# EAGLE board ATTiny84-RFM95W-BME280-panels-2020-01-30 (EAGLE 9.5.2)
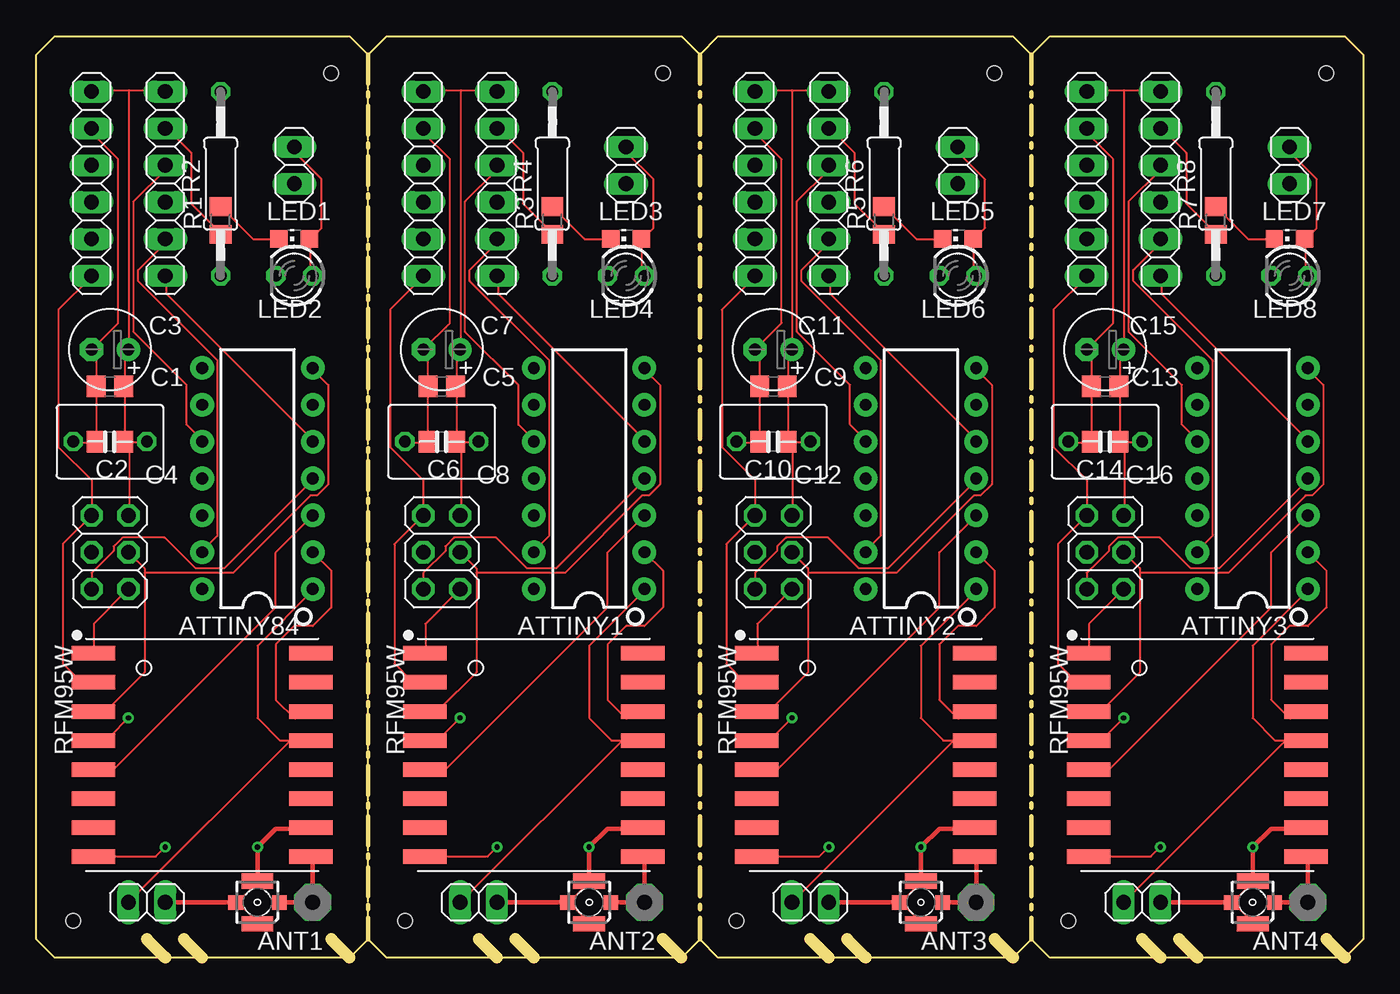
[diagram p0: board, top side]
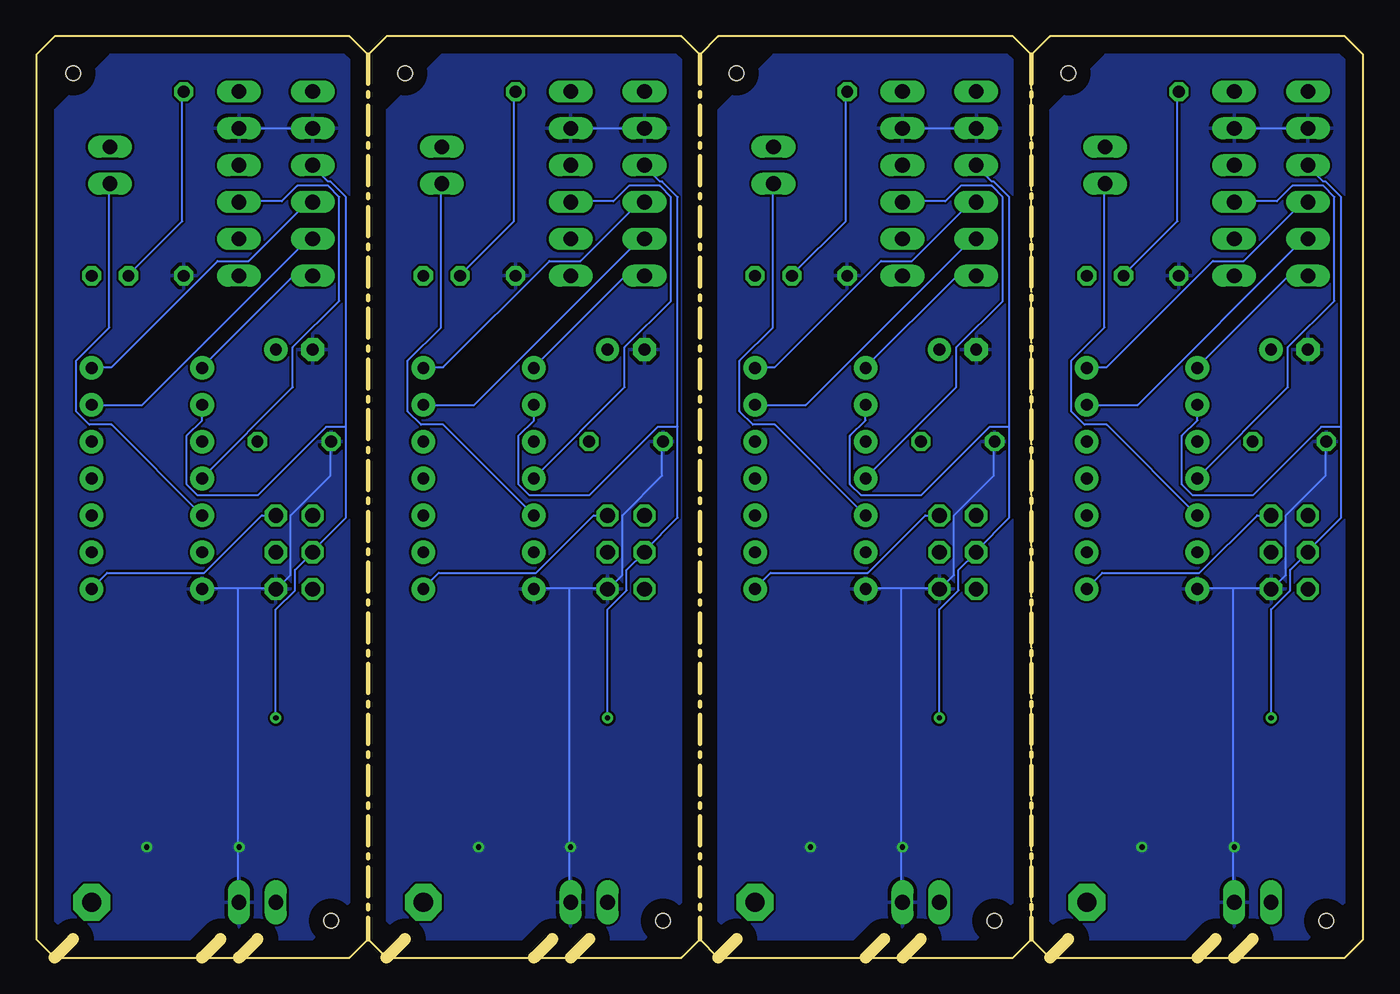
[diagram p1: board, bottom side, seen from below]

Size 91.44 x 63.5 mm. Coordinates in mm from the lower left corner, seen from the top.
Outline: 1.27,0 8.89,0
Outline: 8.89,0 11.43,0
Outline: 11.43,0 21.59,0
Outline: 7.62,1.27 8.89,0
Outline: 10.16,1.27 11.43,0
Outline: 20.32,1.27 21.59,0
Outline: 22.86,62.23 21.59,63.5 1.27,63.5 0,62.23 0,1.27 1.27,0
Outline: 22.86,62.23 22.86,1.27
Outline: 22.86,1.27 21.59,0
Outline: 21.59,0 1.27,0
Outline: 24.13,0 31.75,0
Outline: 31.75,0 34.29,0
Outline: 34.29,0 44.45,0
Outline: 30.48,1.27 31.75,0
Outline: 33.02,1.27 34.29,0
Outline: 43.18,1.27 44.45,0
Outline: 45.72,62.23 44.45,63.5 24.13,63.5 22.86,62.23
Outline: 45.72,62.23 45.72,1.27
Outline: 45.72,1.27 44.45,0
Outline: 44.45,0 24.13,0
Outline: 24.13,0 22.86,1.27
Outline: 46.99,0 54.61,0
Outline: 54.61,0 57.15,0
Outline: 57.15,0 67.31,0
Outline: 53.34,1.27 54.61,0
Outline: 55.88,1.27 57.15,0
Outline: 66.04,1.27 67.31,0
Outline: 68.58,62.23 67.31,63.5 46.99,63.5 45.72,62.23
Outline: 68.58,62.23 68.58,1.27
Outline: 68.58,1.27 67.31,0
Outline: 67.31,0 46.99,0
Outline: 46.99,0 45.72,1.27
Outline: 69.85,0 77.47,0
Outline: 77.47,0 80.01,0
Outline: 80.01,0 90.17,0
Outline: 76.2,1.27 77.47,0
Outline: 78.74,1.27 80.01,0
Outline: 88.9,1.27 90.17,0
Outline: 90.17,0 91.44,1.27 91.44,62.23 90.17,63.5 69.85,63.5 68.58,62.23
Outline: 90.17,0 69.85,0
Outline: 69.85,0 68.58,1.27
Copper layers (1*16): Top 0.035mm / dielectric 1.5mm / Bottom 0.035mm
Design rules "default": minimum track width 6mil, minimum drill 0.35mm, track to track 6mil, track to pad 6mil, pad to pad 6mil, via to via 6mil, smd to smd 6mil, copper to edge 40mil, drill to drill 6mil, minimum pad ring 10mil, minimum via ring 8mil, stop-mask expansion 4mil, vias tented up to drill 0mil, thermal gap 10mil
Holes 1 mm at 2.54,2.54 20.32,60.96 25.4,2.54 43.18,60.96 48.26,2.54 66.04,60.96 71.12,2.54 88.9,60.96
Milling: 106 lines

## Footprints (pad centres in the part's own frame; a part is rotated, then mirrored left to right if it is on the bottom)
PAD-01 = drill 1.321 pad 2.54 octagon: 1 0,0
DIP14 = drill 0.813 pad 1.626: 1 -7.62,-3.81; 2 -5.08,-3.81; 3 -2.54,-3.81; 4 0,-3.81; 5 2.54,-3.81; 6 5.08,-3.81; 7 7.62,-3.81; 8 7.62,3.81; 9 5.08,3.81; 10 2.54,3.81; 11 0,3.81; 12 -2.54,3.81; 13 -5.08,3.81; 14 -7.62,3.81
C0805 = smd 1.3 x 1.5: 1 -0.95,0; 2 0.95,0
E2,5-6 = drill 0.813 pad 1.6: + -1.27,0 | drill 0.813 pad 1.6 octagon: - 1.27,0
C050-050X075 = drill 0.813 octagon: 1 -2.54,0; 2 2.54,0
1X06 = drill 1.016 long: 1 -6.35,0; 2 -3.81,0; 3 -1.27,0; 4 1.27,0; 5 3.81,0; 6 6.35,0
1X02 = drill 1.016 long: 1 -1.27,0; 2 1.27,0
2X03 = drill 1.016 octagon: 1 -2.54,-1.27; 2 -2.54,1.27; 3 0,-1.27; 4 0,1.27; 5 2.54,-1.27; 6 2.54,1.27
CHIP-LED0805 = smd 1.2 x 1.2: A 0,-1.05; C 0,1.05
LED3MM = drill 0.813 octagon: A -1.27,0; K 1.27,0
R0805 = smd 1.3 x 1.5: 1 -0.95,0; 2 0.95,0
0207/12 = drill 0.813 octagon: 1 -6.35,0; 2 6.35,0
RFM95/96/97/98W = smd 3 x 1: 3.3V 7.5,1; !RESET -7.5,-3; ANT 7.5,-7; DIO0 7.5,3; DIO1 7.5,5; DIO2 7.5,7; DIO3 7.5,-3; DIO4 7.5,-1; DIO5 -7.5,-5; GND@1 -7.5,7; GND@2 -7.5,-7; GND@3 7.5,-5; MISO -7.5,5; MOSI -7.5,3; NSS -7.5,-1; SCK -7.5,1
734120110 = smd 1 x 1: 1 0,-1.5; S@1 0,1.5 | smd 1.05 x 2.2: S@2 -1.475,0; S@3 1.475,0

## Placement (x,y rotation side)
ANT1  [PAD-01]  19.05,3.81 0 top
ANT2  [PAD-01]  41.91,3.81 0 top
ANT3  [PAD-01]  64.77,3.81 0 top
ANT4  [PAD-01]  87.63,3.81 0 top
ATTINY1  ATTINY84  [DIP14]  38.1,33.02 90 top
ATTINY2  ATTINY84ATTINY84-20PU  [DIP14]  60.96,33.02 90 top
ATTINY3  ATTINY84ATTINY84-20PU  [DIP14]  83.82,33.02 90 top
ATTINY84  ATTINY84ATTINY84-20PU  [DIP14]  15.24,33.02 90 top
C1  100µF  [C0805]  5.08,39.37 180 top
C2  100nF  [C0805]  5.08,35.56 180 top
C3  100µF  [E2,5-6]  5.08,41.91 180 top
C4  100nF  [C050-050X075]  5.08,35.56 180 top
C5  100µF  [C0805]  27.94,39.37 180 top
C6  100nF  [C0805]  27.94,35.56 180 top
C7  100µF  [E2,5-6]  27.94,41.91 180 top
C8  100nF  [C050-050X075]  27.94,35.56 180 top
C9  100µF  [C0805]  50.8,39.37 180 top
C10  100nF  [C0805]  50.8,35.56 180 top
C11  100µF  [E2,5-6]  50.8,41.91 180 top
C12  100nF  [C050-050X075]  50.8,35.56 180 top
C13  100µF  [C0805]  73.66,39.37 180 top
C14  100nF  [C0805]  73.66,35.56 180 top
C15  100µF  [E2,5-6]  73.66,41.91 180 top
C16  100nF  [C050-050X075]  73.66,35.56 180 top
JP1  SPI  [1X06]  3.81,53.34 270 top
JP2  LED  [1X02]  17.78,54.61 270 top
JP3  GPIO  [1X06]  8.89,53.34 270 top
JP4  Power  [1X02]  7.62,3.81 0 top
JP5  ISP  [2X03]  5.08,27.94 270 top
JP6  SPI  [1X06]  26.67,53.34 270 top
JP7  LED  [1X02]  40.64,54.61 270 top
JP8  GPIO  [1X06]  31.75,53.34 270 top
JP9  Power  [1X02]  30.48,3.81 0 top
JP10  ISP  [2X03]  27.94,27.94 270 top
JP11  SPI  [1X06]  49.53,53.34 270 top
JP12  LED  [1X02]  63.5,54.61 270 top
JP13  GPIO  [1X06]  54.61,53.34 270 top
JP14  Power  [1X02]  53.34,3.81 0 top
JP15  ISP  [2X03]  50.8,27.94 270 top
JP16  SPI  [1X06]  72.39,53.34 270 top
JP17  LED  [1X02]  86.36,54.61 270 top
JP18  GPIO  [1X06]  77.47,53.34 270 top
JP19  Power  [1X02]  76.2,3.81 0 top
JP20  ISP  [2X03]  73.66,27.94 270 top
LED1  [CHIP-LED0805]  17.78,49.53 90 top
LED2  [LED3MM]  17.78,46.99 180 top
LED3  [CHIP-LED0805]  40.64,49.53 90 top
LED4  [LED3MM]  40.64,46.99 180 top
LED5  [CHIP-LED0805]  63.5,49.53 90 top
LED6  [LED3MM]  63.5,46.99 180 top
LED7  [CHIP-LED0805]  86.36,49.53 90 top
LED8  [LED3MM]  86.36,46.99 180 top
R1  470  [R0805]  12.7,50.8 90 top
R2  470  [0207/12]  12.7,53.34 90 top
R3  470  [R0805]  35.56,50.8 90 top
R4  470  [0207/12]  35.56,53.34 90 top
R5  470  [R0805]  58.42,50.8 90 top
R6  470  [0207/12]  58.42,53.34 90 top
R7  470  [R0805]  81.28,50.8 90 top
R8  470  [0207/12]  81.28,53.34 90 top
RFM95W  RFM95W  [RFM95/96/97/98W]  11.43,13.97 0 top
RFM95W1  RFM95W  [RFM95/96/97/98W]  34.29,13.97 0 top
RFM95W2  RFM95W  [RFM95/96/97/98W]  57.15,13.97 0 top
RFM95W3  RFM95W  [RFM95/96/97/98W]  80.01,13.97 0 top
X1  734120110  [734120110]  15.24,3.81 90 top
X2  734120110  [734120110]  38.1,3.81 90 top
X3  734120110  [734120110]  60.96,3.81 90 top
X4  734120110  [734120110]  83.82,3.81 90 top

## Library data of the parts
ANT1-ANT4 = discrete
ATTINY1-ATTINY3 ATTINY84 = SparkFun-IC-Microcontroller
C1-C16 = rcl; SPICEPREFIX: C
JP1-JP20 = pinhead
LED1-LED8 = led
R1-R8 = rcl; SPICEPREFIX: R
RFM95W RFM95W1-RFM95W3 = SparkFun-RF; PROD_ID: IC-13959; PROD_NAME: HopeRF RFM95W
X1-X4 = con-coax

## Nets
CSB: ATTINY84.6 JP1.5
CSB1: ATTINY1.6 JP6.5
CSB2: ATTINY2.6 JP11.5
CSB3: ATTINY3.6 JP16.5
CSH: ATTINY84.3 RFM95W.NSS
CSH1: ATTINY1.3 RFM95W1.NSS
CSH2: ATTINY2.3 RFM95W2.NSS
CSH3: ATTINY3.3 RFM95W3.NSS
DIO: ATTINY84.2 RFM95W.DIO0
DIO1: ATTINY1.2 RFM95W1.DIO0
DIO2: ATTINY2.2 RFM95W2.DIO0
DIO3: ATTINY3.2 RFM95W3.DIO0
GND: ATTINY84.14 C1.2 C2.2 C3.- C4.2 JP1.2 JP3.2 JP4.2 JP5.6 R1.1 R2.1 RFM95W.GND@1 RFM95W.GND@2 RFM95W.GND@3 X1.S@1 X1.S@2 X1.S@3
GND1: ATTINY1.14 C5.2 C6.2 C7.- C8.2 JP6.2 JP8.2 JP9.2 JP10.6 R3.1 R4.1 RFM95W1.GND@1 RFM95W1.GND@2 RFM95W1.GND@3 X2.S@1 X2.S@2 X2.S@3
GND2: ATTINY2.14 C9.2 C10.2 C11.- C12.2 JP11.2 JP13.2 JP14.2 JP15.6 R5.1 R6.1 RFM95W2.GND@1 RFM95W2.GND@2 RFM95W2.GND@3 X3.S@1 X3.S@2 X3.S@3
GND3: ATTINY3.14 C13.2 C14.2 C15.- C16.2 JP16.2 JP18.2 JP19.2 JP20.6 R7.1 R8.1 RFM95W3.GND@1 RFM95W3.GND@2 RFM95W3.GND@3 X4.S@1 X4.S@2 X4.S@3
LED: ATTINY84.12 JP2.2
LED1: ATTINY1.12 JP7.2
LED2: ATTINY2.12 JP12.2
LED3: ATTINY3.12 JP17.2
MISO: ATTINY84.8 JP1.6 JP5.1 RFM95W.MISO
MISO1: ATTINY1.8 JP6.6 JP10.1 RFM95W1.MISO
MISO2: ATTINY2.8 JP11.6 JP15.1 RFM95W2.MISO
MISO3: ATTINY3.8 JP16.6 JP20.1 RFM95W3.MISO
MOSI: ATTINY84.7 JP1.4 JP5.4 RFM95W.MOSI
MOSI1: ATTINY1.7 JP6.4 JP10.4 RFM95W1.MOSI
MOSI2: ATTINY2.7 JP11.4 JP15.4 RFM95W2.MOSI
MOSI3: ATTINY3.7 JP16.4 JP20.4 RFM95W3.MOSI
N$1: ANT1.1 RFM95W.ANT X1.1
N$2: ANT2.1 RFM95W1.ANT X2.1
N$3: LED1.C R1.2
N$4: LED2.K R2.2
N$5: LED3.C R3.2
N$6: LED4.K R4.2
N$7: JP2.1 LED1.A LED2.A
N$8: JP7.1 LED3.A LED4.A
N$9: ANT3.1 RFM95W2.ANT X3.1
N$10: LED5.C R5.2
N$11: LED6.K R6.2
N$12: JP12.1 LED5.A LED6.A
N$13: ANT4.1 RFM95W3.ANT X4.1
N$14: LED7.C R7.2
N$15: LED8.K R8.2
N$16: JP17.1 LED7.A LED8.A
PA0: ATTINY84.13 JP3.5
PA1: ATTINY1.11 JP8.4
PA2: ATTINY84.11 JP3.4
PA3: ATTINY1.13 JP8.5
PA4: ATTINY2.11 JP13.4
PA5: ATTINY2.13 JP13.5
PA6: ATTINY3.11 JP18.4
PA7: ATTINY3.13 JP18.5
PB1: ATTINY1.5 JP8.6
PB2: ATTINY84.5 JP3.6
PB3: ATTINY2.5 JP13.6
PB4: ATTINY3.5 JP18.6
RESET: ATTINY84.4 JP5.5
RESET1: ATTINY1.4 JP10.5
RESET2: ATTINY2.4 JP15.5
RESET3: ATTINY3.4 JP20.5
SCK: ATTINY84.9 JP1.3 JP5.3 RFM95W.SCK
SCK1: ATTINY1.9 JP6.3 JP10.3 RFM95W1.SCK
SCK2: ATTINY2.9 JP11.3 JP15.3 RFM95W2.SCK
SCK3: ATTINY3.9 JP16.3 JP20.3 RFM95W3.SCK
TX: ATTINY84.10 JP3.3
TX1: ATTINY1.10 JP8.3
TX2: ATTINY2.10 JP13.3
TX3: ATTINY3.10 JP18.3
VCC: ATTINY84.1 C1.1 C2.1 C3.+ C4.1 JP1.1 JP3.1 JP4.1 JP5.2 RFM95W.3.3V
VCC1: ATTINY1.1 C5.1 C6.1 C7.+ C8.1 JP6.1 JP8.1 JP9.1 JP10.2 RFM95W1.3.3V
VCC2: ATTINY2.1 C9.1 C10.1 C11.+ C12.1 JP11.1 JP13.1 JP14.1 JP15.2 RFM95W2.3.3V
VCC3: ATTINY3.1 C13.1 C14.1 C15.+ C16.1 JP16.1 JP18.1 JP19.1 JP20.2 RFM95W3.3.3V

## Tracks (layer width: path | path; a pad name or v marks a point on that pad's centre or on a via)
CSB
  Bottom 0.152: JP1.5 4.12,49.53 15.54,38.1 ATTINY84.6
CSB1
  Bottom 0.152: JP6.5 26.98,49.53 38.41,38.1 ATTINY1.6
CSB2
  Bottom 0.152: JP11.5 49.84,49.53 61.27,38.1 ATTINY2.6
CSB3
  Bottom 0.152: JP16.5 72.69,49.53 84.12,38.1 ATTINY3.6
CSH
  Top 0.152: 4.42,13.11 3.96,13.11 RFM95W.NSS 5.35,12.97 16.51,24.13 16.51,27.94 ATTINY84.3 17.98,29.41
CSH1
  Top 0.152: 27.28,13.11 26.82,13.11 RFM95W1.NSS 28.21,12.97 39.37,24.13 39.37,27.94 ATTINY1.3 40.84,29.41
CSH2
  Top 0.152: 50.14,13.11 49.68,13.11 RFM95W2.NSS 51.07,12.97 62.23,24.13 62.23,27.94 ATTINY2.3 63.7,29.41
CSH3
  Top 0.152: 73,13.11 72.54,13.11 RFM95W3.NSS 73.93,12.97 85.09,24.13 85.09,27.94 ATTINY3.3 86.56,29.41
DIO
  Top 0.152: 19.05,27.89 ATTINY84.2 20.32,26.67 20.32,24.13 19.05,22.86 17.78,22.86 16.51,21.59 16.51,17.78 17.83,16.46 18.29,16.92 18.9,16.92 RFM95W.DIO0 19.03,17.07 19.36,17.07
DIO1
  Top 0.152: 41.91,27.89 ATTINY1.2 43.18,26.67 43.18,24.13 41.91,22.86 40.64,22.86 39.37,21.59 39.37,17.78 40.69,16.46 41.15,16.92 41.76,16.92 RFM95W1.DIO0 41.89,17.07 42.22,17.07
DIO2
  Top 0.152: 64.77,27.89 ATTINY2.2 66.04,26.67 66.04,24.13 64.77,22.86 63.5,22.86 62.23,21.59 62.23,17.78 63.55,16.46 64.01,16.92 64.62,16.92 RFM95W2.DIO0 64.75,17.07 65.08,17.07
DIO3
  Top 0.152: 87.63,27.89 ATTINY3.2 88.9,26.67 88.9,24.13 87.63,22.86 86.36,22.86 85.09,21.59 85.09,17.78 86.41,16.46 86.87,16.92 87.48,16.92 RFM95W3.DIO0 87.61,17.07 87.94,17.07
GND  (via drill 0.35)
  Top 0.152: 13.87,3.81 15.24,5.18 X1.S@3 | 13.87,3.81 15.24,2.44 | 15.24,2.44 X1.S@2 | 13.87,3.81 X1.S@1 | 18.44,8.84 18.9,8.84 RFM95W.GND@3 | X1.S@3 15.24,5.64 | R2.1 12.8,47.09 12.8,49.84 R1.1 12.65,49.99 10.67,51.97 10.67,55.47 8.99,57.15 JP3.2 | C4.2 2.59,35.51 4.12,35.51 C2.2 4.12,35.66 4.12,39.32 C1.2 4.12,39.47 4.12,41.6 C3.- 5.64,43.74 5.64,55.02 3.81,56.84 JP1.2 | JP5.6 3.96,23.01 3.96,21.03 RFM95W.GND@1 | 15.24,5.08 X1.S@3 | 15.34,2.54 15.24,2.44 | 3.96,6.86 RFM95W.GND@2 8.24,6.97 v8.89,7.62 | 8.84,3.81 JP4.2
  Top 0.305: RFM95W.GND@3 18.85,8.89 16.51,8.89 v15.24,7.62 X1.S@3 | X1.S@1 JP4.2
  Bottom 0.152: JP3.2 JP1.2 | 8.99,25.45 6.4,25.45 JP5.6 6.25,25.45 5.33,26.36 5.33,30.48 2.59,33.22 2.59,35.51 C4.2 | 8.99,25.45 11.43,25.45 ATTINY84.14 | 8.99,25.45 8.99,3.81 JP4.2
  pour Bottom: 1.27,62.23 17.78,62.23 20.32,59.69 21.59,58.42 21.59,2.54 20.32,1.27 3.81,1.27 1.27,3.81
GND1  (via drill 0.35)
  Top 0.152: 36.73,3.81 38.1,5.18 X2.S@3 | 36.73,3.81 38.1,2.44 | 38.1,2.44 X2.S@2 | 36.73,3.81 X2.S@1 | 41.3,8.84 41.76,8.84 RFM95W1.GND@3 | X2.S@3 38.1,5.64 | R4.1 35.66,47.09 35.66,49.84 R3.1 35.51,49.99 33.53,51.97 33.53,55.47 31.85,57.15 JP8.2 | C8.2 25.45,35.51 26.98,35.51 C6.2 26.98,35.66 26.98,39.32 C5.2 26.98,39.47 26.98,41.6 C7.- 28.5,43.74 28.5,55.02 26.67,56.84 JP6.2 | JP10.6 26.82,23.01 26.82,21.03 RFM95W1.GND@1 | 38.1,5.08 X2.S@3 | 38.2,2.54 38.1,2.44 | 26.82,6.86 RFM95W1.GND@2 31.1,6.97 v31.75,7.62 | 31.7,3.81 JP9.2
  Top 0.305: RFM95W1.GND@3 41.71,8.89 39.37,8.89 v38.1,7.62 X2.S@3 | X2.S@1 JP9.2
  Bottom 0.152: JP8.2 JP6.2 | 31.85,25.45 29.26,25.45 JP10.6 29.11,25.45 28.19,26.36 28.19,30.48 25.45,33.22 25.45,35.51 C8.2 | 31.85,25.45 34.29,25.45 ATTINY1.14 | 31.85,25.45 31.85,3.81 JP9.2
  pour Bottom: 24.13,62.23 40.64,62.23 43.18,59.69 44.45,58.42 44.45,2.54 43.18,1.27 26.67,1.27 24.13,3.81
GND2  (via drill 0.35)
  Top 0.152: 59.59,3.81 60.96,5.18 X3.S@3 | 59.59,3.81 60.96,2.44 | 60.96,2.44 X3.S@2 | 59.59,3.81 X3.S@1 | 64.16,8.84 64.62,8.84 RFM95W2.GND@3 | X3.S@3 60.96,5.64 | R6.1 58.52,47.09 58.52,49.84 R5.1 58.37,49.99 56.39,51.97 56.39,55.47 54.71,57.15 JP13.2 | C12.2 48.31,35.51 49.84,35.51 C10.2 49.84,35.66 49.84,39.32 C9.2 49.84,39.47 49.84,41.6 C11.- 51.36,43.74 51.36,55.02 49.53,56.84 JP11.2 | JP15.6 49.68,23.01 49.68,21.03 RFM95W2.GND@1 | 60.96,5.08 X3.S@3 | 61.06,2.54 60.96,2.44 | 49.68,6.86 RFM95W2.GND@2 53.96,6.97 v54.61,7.62 | 54.56,3.81 JP14.2
  Top 0.305: RFM95W2.GND@3 64.57,8.89 62.23,8.89 v60.96,7.62 X3.S@3 | X3.S@1 JP14.2
  Bottom 0.152: JP13.2 JP11.2 | 54.71,25.45 52.12,25.45 JP15.6 51.97,25.45 51.05,26.36 51.05,30.48 48.31,33.22 48.31,35.51 C12.2 | 54.71,25.45 57.15,25.45 ATTINY2.14 | 54.71,25.45 54.71,3.81 JP14.2
  pour Bottom: 46.99,62.23 63.5,62.23 66.04,59.69 67.31,58.42 67.31,2.54 66.04,1.27 49.53,1.27 46.99,3.81
GND3  (via drill 0.35)
  Top 0.152: 82.45,3.81 83.82,5.18 X4.S@3 | 82.45,3.81 83.82,2.44 | 83.82,2.44 X4.S@2 | 82.45,3.81 X4.S@1 | 87.02,8.84 87.48,8.84 RFM95W3.GND@3 | X4.S@3 83.82,5.64 | R8.1 81.38,47.09 81.38,49.84 R7.1 81.23,49.99 79.25,51.97 79.25,55.47 77.57,57.15 JP18.2 | C16.2 71.17,35.51 72.69,35.51 C14.2 72.69,35.66 72.69,39.32 C13.2 72.69,39.47 72.69,41.6 C15.- 74.22,43.74 74.22,55.02 72.39,56.84 JP16.2 | JP20.6 72.54,23.01 72.54,21.03 RFM95W3.GND@1 | 83.82,5.08 X4.S@3 | 83.92,2.54 83.82,2.44 | 72.54,6.86 RFM95W3.GND@2 76.82,6.97 v77.47,7.62 | 77.42,3.81 JP19.2
  Top 0.305: RFM95W3.GND@3 87.43,8.89 85.09,8.89 v83.82,7.62 X4.S@3 | X4.S@1 JP19.2
  Bottom 0.152: JP18.2 JP16.2 | 77.57,25.45 74.98,25.45 JP20.6 74.83,25.45 73.91,26.36 73.91,30.48 71.17,33.22 71.17,35.51 C16.2 | 77.57,25.45 80.01,25.45 ATTINY3.14 | 77.57,25.45 77.57,3.81 JP19.2
  pour Bottom: 69.85,62.23 86.36,62.23 88.9,59.69 90.17,58.42 90.17,2.54 88.9,1.27 72.39,1.27 69.85,3.81
LED
  Bottom 0.152: ATTINY84.12 17.68,36.73 19.2,36.73 20.12,37.64 20.12,41.15 17.83,43.43 17.83,53.34 JP2.2
LED1
  Bottom 0.152: ATTINY1.12 40.54,36.73 42.06,36.73 42.98,37.64 42.98,41.15 40.69,43.43 40.69,53.34 JP7.2
LED2
  Bottom 0.152: ATTINY2.12 63.4,36.73 64.92,36.73 65.84,37.64 65.84,41.15 63.55,43.43 63.55,53.34 JP12.2
LED3
  Bottom 0.152: ATTINY3.12 86.26,36.73 87.78,36.73 88.7,37.64 88.7,41.15 86.41,43.43 86.41,53.34 JP17.2
MISO
  Top 0.152: RFM95W.MISO 3.81,19.05 3.05,19.05 1.83,20.27 1.83,28.5 JP5.1 3.81,32.92 1.52,35.2 1.52,44.65 3.81,46.94 JP1.6
  Bottom 0.152: JP1.6 3.81,46.94 5.18,46.94 11.43,40.69 ATTINY84.8
MISO1
  Top 0.152: RFM95W1.MISO 26.67,19.05 25.91,19.05 24.69,20.27 24.69,28.5 JP10.1 26.67,32.92 24.38,35.2 24.38,44.65 26.67,46.94 JP6.6
  Bottom 0.152: JP6.6 26.67,46.94 28.04,46.94 34.29,40.69 ATTINY1.8
MISO2
  Top 0.152: RFM95W2.MISO 49.53,19.05 48.77,19.05 47.55,20.27 47.55,28.5 JP15.1 49.53,32.92 47.24,35.2 47.24,44.65 49.53,46.94 JP11.6
  Bottom 0.152: JP11.6 49.53,46.94 50.9,46.94 57.15,40.69 ATTINY2.8
MISO3
  Top 0.152: RFM95W3.MISO 72.39,19.05 71.63,19.05 70.41,20.27 70.41,28.5 JP20.1 72.39,32.92 70.1,35.2 70.1,44.65 72.39,46.94 JP16.6
  Bottom 0.152: JP16.6 72.39,46.94 73.76,46.94 80.01,40.69 ATTINY3.8
MOSI
  Top 0.152: 7.47,26.52 7.47,26.82 JP5.4 | 7.47,26.52 7.47,19.66 4.88,17.07 3.96,17.07 RFM95W.MOSI | 7.47,26.52 13.56,26.52 18.9,31.85 19.36,31.85 20.12,32.61 20.12,39.47 19.05,40.54 ATTINY84.7
  Bottom 0.152: JP1.4 3.81,51.97 4.27,51.97 8.23,48.01 10.36,48.01 17.68,40.69 19.05,40.69 ATTINY84.7
MOSI1
  Top 0.152: 30.33,26.52 30.33,26.82 JP10.4 | 30.33,26.52 30.33,19.66 27.74,17.07 26.82,17.07 RFM95W1.MOSI | 30.33,26.52 36.42,26.52 41.76,31.85 42.22,31.85 42.98,32.61 42.98,39.47 41.91,40.54 ATTINY1.7
  Bottom 0.152: JP6.4 26.67,51.97 27.13,51.97 31.09,48.01 33.22,48.01 40.54,40.69 41.91,40.69 ATTINY1.7
MOSI2
  Top 0.152: 53.19,26.52 53.19,26.82 JP15.4 | 53.19,26.52 53.19,19.66 50.6,17.07 49.68,17.07 RFM95W2.MOSI | 53.19,26.52 59.28,26.52 64.62,31.85 65.08,31.85 65.84,32.61 65.84,39.47 64.77,40.54 ATTINY2.7
  Bottom 0.152: JP11.4 49.53,51.97 49.99,51.97 53.95,48.01 56.08,48.01 63.4,40.69 64.77,40.69 ATTINY2.7
MOSI3
  Top 0.152: 76.05,26.52 76.05,26.82 JP20.4 | 76.05,26.52 76.05,19.66 73.46,17.07 72.54,17.07 RFM95W3.MOSI | 76.05,26.52 82.14,26.52 87.48,31.85 87.94,31.85 88.7,32.61 88.7,39.47 87.63,40.54 ATTINY3.7
  Bottom 0.152: JP16.4 72.39,51.97 72.85,51.97 76.81,48.01 78.94,48.01 86.26,40.69 87.63,40.69 ATTINY3.7
N$1
  Top 0.305: X1.1 ANT1.1 19.05,6.85 RFM95W.ANT
N$2
  Top 0.305: X2.1 ANT2.1 41.91,6.85 RFM95W1.ANT
N$3
  Top 0.152: LED1.C 14.94,49.53 12.8,51.66 R1.2
N$4
  Bottom 0.152: R2.2 12.8,59.59 12.8,50.75 16.46,47.09 LED2.K
N$5
  Top 0.152: LED3.C 37.8,49.53 35.66,51.66 R3.2
N$6
  Bottom 0.152: R4.2 35.66,59.59 35.66,50.75 39.32,47.09 LED4.K
N$7
  Top 0.152: 18.9,49.53 18.9,47.24 19.05,47.09 LED2.A | 18.9,49.53 19.66,50.29 19.66,53.65 17.83,55.47 17.83,55.78 JP2.1 | 18.9,49.53 LED1.A
N$8
  Top 0.152: 41.76,49.53 41.76,47.24 41.91,47.09 LED4.A | 41.76,49.53 42.52,50.29 42.52,53.65 40.69,55.47 40.69,55.78 JP7.1 | 41.76,49.53 LED3.A
N$9
  Top 0.305: X3.1 ANT3.1 64.77,6.85 RFM95W2.ANT
N$10
  Top 0.152: LED5.C 60.66,49.53 58.52,51.66 R5.2
N$11
  Bottom 0.152: R6.2 58.52,59.59 58.52,50.75 62.18,47.09 LED6.K
N$12
  Top 0.152: 64.62,49.53 64.62,47.24 64.77,47.09 LED6.A | 64.62,49.53 65.38,50.29 65.38,53.65 63.55,55.47 63.55,55.78 JP12.1 | 64.62,49.53 LED5.A
N$13
  Top 0.305: X4.1 ANT4.1 87.63,6.85 RFM95W3.ANT
N$14
  Top 0.152: LED7.C 83.52,49.53 81.38,51.66 R7.2
N$15
  Bottom 0.152: R8.2 81.38,59.59 81.38,50.75 85.04,47.09 LED8.K
N$16
  Top 0.152: 87.48,49.53 87.48,47.24 87.63,47.09 LED8.A | 87.48,49.53 88.24,50.29 88.24,53.65 86.41,55.47 86.41,55.78 JP17.1 | 87.48,49.53 LED7.A
PA0
  Top 0.152: JP3.5 8.84,49.53 8.84,49.23 7.01,47.4 7.01,46.63 12.5,41.15 12.5,29.11 11.43,28.04 ATTINY84.13
PA1
  Bottom 0.152: JP8.4 31.7,52.12 28.8,52.12 27.74,53.19 25.6,53.19 24.84,52.43 24.84,45.26 28.04,42.06 28.04,39.32 34.29,33.07 ATTINY1.11
PA2
  Bottom 0.152: JP3.4 8.84,52.12 5.94,52.12 4.88,53.19 2.74,53.19 1.98,52.43 1.98,45.26 5.18,42.06 5.18,39.32 11.43,33.07 ATTINY84.11
PA3
  Top 0.152: JP8.5 31.7,49.53 31.7,49.23 29.87,47.4 29.87,46.63 35.36,41.15 35.36,29.11 34.29,28.04 ATTINY1.13
PA4
  Bottom 0.152: JP13.4 54.56,52.12 51.66,52.12 50.6,53.19 48.46,53.19 47.7,52.43 47.7,45.26 50.9,42.06 50.9,39.32 57.15,33.07 ATTINY2.11
PA5
  Top 0.152: JP13.5 54.56,49.53 54.56,49.23 52.73,47.4 52.73,46.63 58.22,41.15 58.22,29.11 57.15,28.04 ATTINY2.13
PA6
  Bottom 0.152: JP18.4 77.42,52.12 74.52,52.12 73.46,53.19 71.32,53.19 70.56,52.43 70.56,45.26 73.76,42.06 73.76,39.32 80.01,33.07 ATTINY3.11
PA7
  Top 0.152: JP18.5 77.42,49.53 77.42,49.23 75.59,47.4 75.59,46.63 81.08,41.15 81.08,29.11 80.01,28.04 ATTINY3.13
PB1
  Top 0.152: JP8.6 31.85,46.94 31.85,45.72 41.91,35.66 ATTINY1.5
PB2
  Top 0.152: JP3.6 8.99,46.94 8.99,45.72 19.05,35.66 ATTINY84.5
PB3
  Top 0.152: JP13.6 54.71,46.94 54.71,45.72 64.77,35.66 ATTINY2.5
PB4
  Top 0.152: JP18.6 77.57,46.94 77.57,45.72 87.63,35.66 ATTINY3.5
RESET
  Top 0.152: JP5.5 3.81,26.52 5.33,28.04 5.33,28.35 5.94,28.96 8.84,28.96 10.97,26.82 12.95,26.82 19.05,32.92 ATTINY84.4
RESET1
  Top 0.152: JP10.5 26.67,26.52 28.19,28.04 28.19,28.35 28.8,28.96 31.7,28.96 33.83,26.82 35.81,26.82 41.91,32.92 ATTINY1.4
RESET2
  Top 0.152: JP15.5 49.53,26.52 51.05,28.04 51.05,28.35 51.66,28.96 54.56,28.96 56.69,26.82 58.67,26.82 64.77,32.92 ATTINY2.4
RESET3
  Top 0.152: JP20.5 72.39,26.52 73.91,28.04 73.91,28.35 74.52,28.96 77.42,28.96 79.55,26.82 81.53,26.82 87.63,32.92 ATTINY3.4
SCK  (via drill 0.35)
  Top 0.152: 3.35,15.09 3.81,15.09 RFM95W.SCK 4.2,15.24 5.08,15.24 v6.35,16.51 | 3.81,27.89 JP5.3
  Bottom 0.152: 1.52,36.58 1.52,30.33 3.81,28.04 JP5.3 5.03,26.72 5.03,25.32 6.35,24 v6.35,16.51 | 1.52,36.58 1.52,52.43 2.59,53.49 2.74,53.49 3.81,54.56 JP1.3 | ATTINY84.9 11.43,37.03 12.5,35.97 12.5,32.61 11.73,31.85 7.62,31.85 2.9,36.58 1.52,36.58
SCK1  (via drill 0.35)
  Top 0.152: 26.21,15.09 26.67,15.09 RFM95W1.SCK 27.06,15.24 27.94,15.24 v29.21,16.51 | 26.67,27.89 JP10.3
  Bottom 0.152: 24.38,36.58 24.38,30.33 26.67,28.04 JP10.3 27.89,26.72 27.89,25.32 29.21,24 v29.21,16.51 | 24.38,36.58 24.38,52.43 25.45,53.49 25.6,53.49 26.67,54.56 JP6.3 | ATTINY1.9 34.29,37.03 35.36,35.97 35.36,32.61 34.59,31.85 30.48,31.85 25.76,36.58 24.38,36.58
SCK2  (via drill 0.35)
  Top 0.152: 49.07,15.09 49.53,15.09 RFM95W2.SCK 49.92,15.24 50.8,15.24 v52.07,16.51 | 49.53,27.89 JP15.3
  Bottom 0.152: 47.24,36.58 47.24,30.33 49.53,28.04 JP15.3 50.75,26.72 50.75,25.32 52.07,24 v52.07,16.51 | 47.24,36.58 47.24,52.43 48.31,53.49 48.46,53.49 49.53,54.56 JP11.3 | ATTINY2.9 57.15,37.03 58.22,35.97 58.22,32.61 57.45,31.85 53.34,31.85 48.62,36.58 47.24,36.58
SCK3  (via drill 0.35)
  Top 0.152: 71.93,15.09 72.39,15.09 RFM95W3.SCK 72.78,15.24 73.66,15.24 v74.93,16.51 | 72.39,27.89 JP20.3
  Bottom 0.152: 70.1,36.58 70.1,30.33 72.39,28.04 JP20.3 73.61,26.72 73.61,25.32 74.93,24 v74.93,16.51 | 70.1,36.58 70.1,52.43 71.17,53.49 71.32,53.49 72.39,54.56 JP16.3 | ATTINY3.9 80.01,37.03 81.08,35.97 81.08,32.61 80.31,31.85 76.2,31.85 71.48,36.58 70.1,36.58
TX
  Top 0.152: JP3.3 8.84,54.56 8.84,54.25 6.71,52.12 6.71,43.13 10.36,39.47 10.36,36.73 11.43,35.66 ATTINY84.10
TX1
  Top 0.152: JP8.3 31.7,54.56 31.7,54.25 29.57,52.12 29.57,43.13 33.22,39.47 33.22,36.73 34.29,35.66 ATTINY1.10
TX2
  Top 0.152: JP13.3 54.56,54.56 54.56,54.25 52.43,52.12 52.43,43.13 56.08,39.47 56.08,36.73 57.15,35.66 ATTINY2.10
TX3
  Top 0.152: JP18.3 77.42,54.56 77.42,54.25 75.29,52.12 75.29,43.13 78.94,39.47 78.94,36.73 80.01,35.66 ATTINY3.10
VCC
  Top 0.152: 6.4,59.74 8.84,59.74 JP3.1 | 6.4,59.74 3.81,59.74 JP1.1 | 6.4,35.51 7.62,35.51 C4.1 | 6.4,35.51 6.1,35.51 C2.1 | C2.1 6.1,35.66 6.1,39.32 C1.1 6.1,39.47 6.1,41.76 6.25,41.91 C3.+ 6.4,41.91 6.4,59.74 | 6.4,35.51 6.4,30.48 JP5.2 | 6.4,35.51 C2.1 | ATTINY84.1 19.05,25.3 15.24,21.49 15.24,16.51 16.78,14.97 17.75,14.97 | 6.4,3.81 JP4.1 17.63,15.09 17.75,14.97 | RFM95W.3.3V 17.75,14.97
  Bottom 0.152: JP5.2 7.32,30.48 11.28,26.52 17.98,26.52 19.05,25.45 ATTINY84.1
VCC1
  Top 0.152: 29.26,59.74 31.7,59.74 JP8.1 | 29.26,59.74 26.67,59.74 JP6.1 | 29.26,35.51 30.48,35.51 C8.1 | 29.26,35.51 28.96,35.51 C6.1 | C6.1 28.96,35.66 28.96,39.32 C5.1 28.96,39.47 28.96,41.76 29.11,41.91 C7.+ 29.26,41.91 29.26,59.74 | 29.26,35.51 29.26,30.48 JP10.2 | 29.26,35.51 C6.1 | ATTINY1.1 41.91,25.3 38.1,21.49 38.1,16.51 39.64,14.97 40.6,14.97 | 29.26,3.81 JP9.1 40.49,15.09 40.6,14.97 | RFM95W1.3.3V 40.6,14.97
  Bottom 0.152: JP10.2 30.18,30.48 34.14,26.52 40.84,26.52 41.91,25.45 ATTINY1.1
VCC2
  Top 0.152: 52.12,59.74 54.56,59.74 JP13.1 | 52.12,59.74 49.53,59.74 JP11.1 | 52.12,35.51 53.34,35.51 C12.1 | 52.12,35.51 51.82,35.51 C10.1 | C10.1 51.82,35.66 51.82,39.32 C9.1 51.82,39.47 51.82,41.76 51.97,41.91 C11.+ 52.12,41.91 52.12,59.74 | 52.12,35.51 52.12,30.48 JP15.2 | 52.12,35.51 C10.1 | ATTINY2.1 64.77,25.3 60.96,21.49 60.96,16.51 62.5,14.97 63.47,14.97 | 52.12,3.81 JP14.1 63.35,15.09 63.47,14.97 | RFM95W2.3.3V 63.47,14.97
  Bottom 0.152: JP15.2 53.03,30.48 57,26.52 63.7,26.52 64.77,25.45 ATTINY2.1
VCC3
  Top 0.152: 74.98,59.74 77.42,59.74 JP18.1 | 74.98,59.74 72.39,59.74 JP16.1 | 74.98,35.51 76.2,35.51 C16.1 | 74.98,35.51 74.68,35.51 C14.1 | C14.1 74.68,35.66 74.68,39.32 C13.1 74.68,39.47 74.68,41.76 74.83,41.91 C15.+ 74.98,41.91 74.98,59.74 | 74.98,35.51 74.98,30.48 JP20.2 | 74.98,35.51 C14.1 | ATTINY3.1 87.63,25.3 83.82,21.49 83.82,16.51 85.36,14.97 86.33,14.97 | 74.98,3.81 JP19.1 86.21,15.09 86.33,14.97 | RFM95W3.3.3V 86.33,14.97
  Bottom 0.152: JP20.2 75.89,30.48 79.86,26.52 86.56,26.52 87.63,25.45 ATTINY3.1

## Text on the board
tNames: RFM95W | RFM95W | RFM95W | RFM95W
tValues: ° | ° | ° | ° | ° | ° | ° | ° | MISO CSB MOSI SCK GND VCC | PB2 PA0 PA2 TX GND VCC | MISO CSB MOSI SCK GND VCC | PB2 PA0 PA2 TX GND VCC | MISO CSB MOSI SCK GND VCC | PB2 PA0 PA2 TX GND VCC | MISO CSB MOSI SCK GND VCC | PB2 PA0 PA2 TX GND VCC | ° | ° | ° | ° | MI Vcc / / CL MO / / Rst Gd | MI Vcc / / CL MO / / Rst Gd | MI Vcc / / CL MO / / Rst Gd | MI Vcc / / CL MO / / Rst Gd | (c) Joachim Banzhaf 2020, 1.8-3.6V, <10µA sleep, <100mA tx | (c) Joachim Banzhaf 2020, 1.8-3.6V, <10µA sleep, <100mA tx | (c) Joachim Banzhaf 2020, 1.8-3.6V, <10µA sleep, <100mA tx | (c) Joachim Banzhaf 2020, 1.8-3.6V, <10µA sleep, <100mA tx | 3V3 | Gnd | 3V3 | Gnd | 3V3 | Gnd | 3V3 | Gnd